# Allegro board demob2.brd
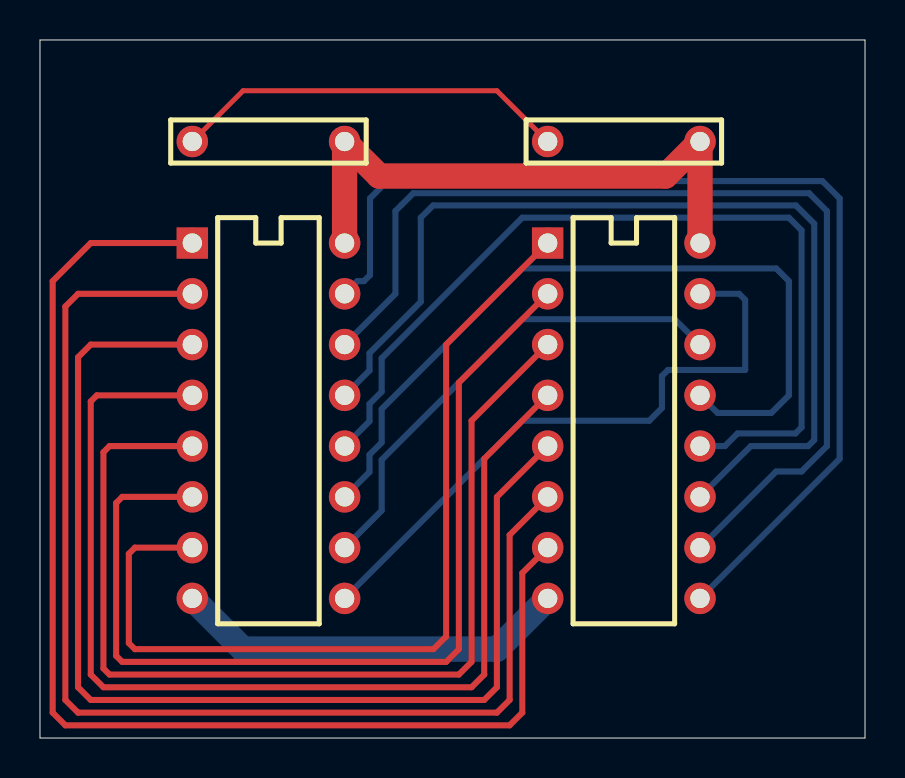
[diagram p0: board, top side]
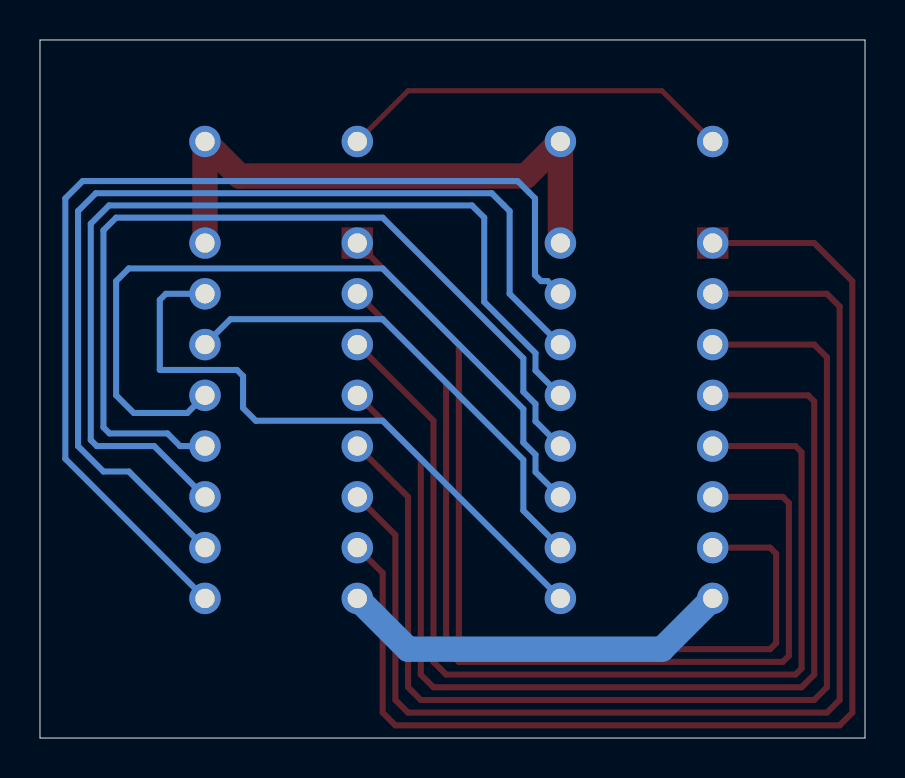
[diagram p1: board, bottom side, seen from below]

Outline 41.27 x 34.93 mm; copper layers: TOP, GND, POWER, INNER1, INNER2, BOTTOM. Coordinates in mm from the lower left corner of the outline.
Outline path: 0,34.93 41.27,34.93 41.27,0 0,0 0,34.93

## Design rules (mm)
nets with their own width: min track width 0.254; nets GND_SIGNAL
nets with their own width: min track width 0.305; nets N01899 N01900 N01901 N01902 N01903 N01904 N01905 N01906 N01907 N01908 N01909 N01910 N01911 N01912
nets with their own width: min track width 1.27; nets GND VCC

## Placement (name value [footprint] x y rotation side)
C1  CAP NP  [AC300100A]  15.24 29.85 180 top
C2  CAP NP  [AC300100A]  33.02 29.85 180 top
U1  74LS158  [DIP16]  7.62 24.77 270 top
U2  74LS158  [DIP16]  25.4 24.77 270 top

## Library data of the parts
C1 C2 = CAP_NP
U1 U2 = 74LS158

## Footprints (pads in the part's own frame, mm; a bottom-side part is the same pattern mirrored in y, then rotated)
AC300100A
  round 1.575 hole 0.965: 1(0,0) 2(7.62,0)
DIP16
  rect 1.575x1.575 hole 0.965: 1(0,0)
  round 1.575 hole 0.965: 2(2.54,0) 3(5.08,0) 4(7.62,0) 5(10.16,0) 6(12.7,0) 7(15.24,0) 8(17.78,0) 9(17.78,7.62) 10(15.24,7.62) 11(12.7,7.62) 12(10.16,7.62) 13(7.62,7.62) 14(5.08,7.62) 15(2.54,7.62) 16(0,7.62)

## Nets
GND: U1.8(TP-8) U2.8(TP-8)
GND_SIGNAL: C1.2(TP-2) C2.2(TP-2)
VCC: C1.1(TP-1) C2.1(TP-1) U1.16(TP-16) U2.16(TP-16)
N01899: U1.2(TP-2) U2.6(TP-6)
N01900: U1.3(TP-3) U2.5(TP-5)
N01901: U1.4(TP-4) U2.4(TP-4)
N01902: U1.5(TP-5) U2.3(TP-3)
N01903: U1.6(TP-6) U2.2(TP-2)
N01904: U1.7(TP-7) U2.1(TP-1)
N01905: U1.9(TP-9) U2.15(TP-15)
N01906: U1.10(TP-10) U2.14(TP-14)
N01907: U1.11(TP-11) U2.13(TP-13)
N01908: U1.12(TP-12) U2.12(TP-12)
N01909: U1.14(TP-14) U2.10(TP-10)
N01910: U1.1(TP-1) U2.7(TP-7)
N01911: U1.13(TP-13) U2.11(TP-11)
N01912: U1.15(TP-15) U2.9(TP-9)

## Routing (per net, layer and track width the routed paths; a pad name or vN(x,y) marks a point on that pad's centre or on a via; arc(x,y) is an arc through that point)
GND: length 19.9
  BOTTOM w1.27: U2.8 22.86,4.45 10.16,4.45 U1.8
GND_SIGNAL: length 19.9
  TOP w0.254: C2.2 22.86,32.39 10.16,32.39 C1.2
VCC: length 29.4
  TOP w1.27: U1.16 C1.1 16.97,28.12 31.29,28.12 C2.1 U2.16
N01899: length 60
  TOP w0.305: U2.6 23.5,10.16 23.5,1.91 22.86,1.27 1.91,1.27 1.27,1.91 1.27,21.59 1.91,22.22 U1.2
N01900: length 57.1
  TOP w0.305: U2.5 22.86,12.07 22.86,2.54 22.23,1.91 2.54,1.91 1.91,2.54 1.91,19.05 2.54,19.68 U1.3
N01901: length 54.4
  TOP w0.305: U2.4 22.23,13.97 22.23,3.17 21.59,2.54 3.17,2.54 2.54,3.17 2.54,16.84 2.84,17.14 U1.4
N01902: length 51.6
  TOP w0.305: U2.3 21.59,15.88 21.59,3.81 20.95,3.17 3.48,3.17 3.17,3.48 3.17,14.3 3.48,14.61 U1.5
N01903: length 48.7
  TOP w0.305: U2.2 20.95,17.78 20.95,4.45 20.32,3.81 4.11,3.81 3.81,4.11 3.81,11.76 4.11,12.07 U1.6
N01904: length 45.8
  TOP w0.305: U1.7 4.75,9.52 4.45,9.22 4.45,4.75 4.75,4.45 19.68,4.45 20.32,5.08 20.32,19.68 U2.1
N01905: length 31.6
  BOTTOM w0.305: U2.15 34.98,22.22 35.28,21.92 35.28,18.41 31.42,18.41 31.11,18.11 31.11,16.51 30.48,15.88 24.13,15.88 U1.9
N01906: length 24.5
  BOTTOM w0.305: U2.14 31.75,20.95 24.13,20.95 17.09,13.92 17.09,11.38 U1.10
N01907: length 39.6
  BOTTOM w0.305: U2.13 33.9,16.26 36.58,16.26 37.47,17.14 37.47,22.86 36.83,23.5 24.13,23.5 17.09,16.46 17.09,14.79 16.48,14.18 16.48,13.31 U1.11
N01908: length 44.7
  BOTTOM w0.305: U1.12 16.48,15.85 16.48,16.72 17.09,17.33 17.09,19 24.13,26.04 37.47,26.04 38.1,25.4 38.1,15.54 37.8,15.24 34.9,15.24 34.26,14.61 U2.12
N01909: length 50.3
  BOTTOM w0.305: U1.14 17.78,22.22 17.78,26.37 18.08,26.67 18.67,27.26 38.48,27.26 39.37,26.37 39.37,14.61 38.1,13.34 36.83,13.34 U2.10
N01910: length 62.2
  TOP w0.305: U2.7 24.13,8.25 24.13,1.27 23.5,0.64 1.27,0.64 0.64,1.27 0.64,22.86 2.54,24.77 U1.1
N01911: length 48.5
  BOTTOM w0.305: U1.13 16.48,18.39 16.48,19.26 19.05,21.82 19.05,26.04 19.66,26.65 37.82,26.65 38.73,25.73 38.73,14.91 38.43,14.61 35.56,14.61 U2.11
N01912: length 52.6
  BOTTOM w0.305: U1.15 15.88,22.86 16.21,22.86 16.51,23.16 16.51,27 16.81,27.3 17.38,27.87 39.14,27.87 40.01,27 40.01,13.97 U2.9
